# Altium PCB PCB.PcbDoc
Units mil, origin at the board's own origin, x right, y up, seen from the top; angles counter-clockwise.
Board outline 4000 x 6000 mil, 2 copper layers (Top Layer, Bottom Layer); 79 components, 68 nets, 288 pads, 16 vias.
Unrouted connection lines stored in the file: 188.
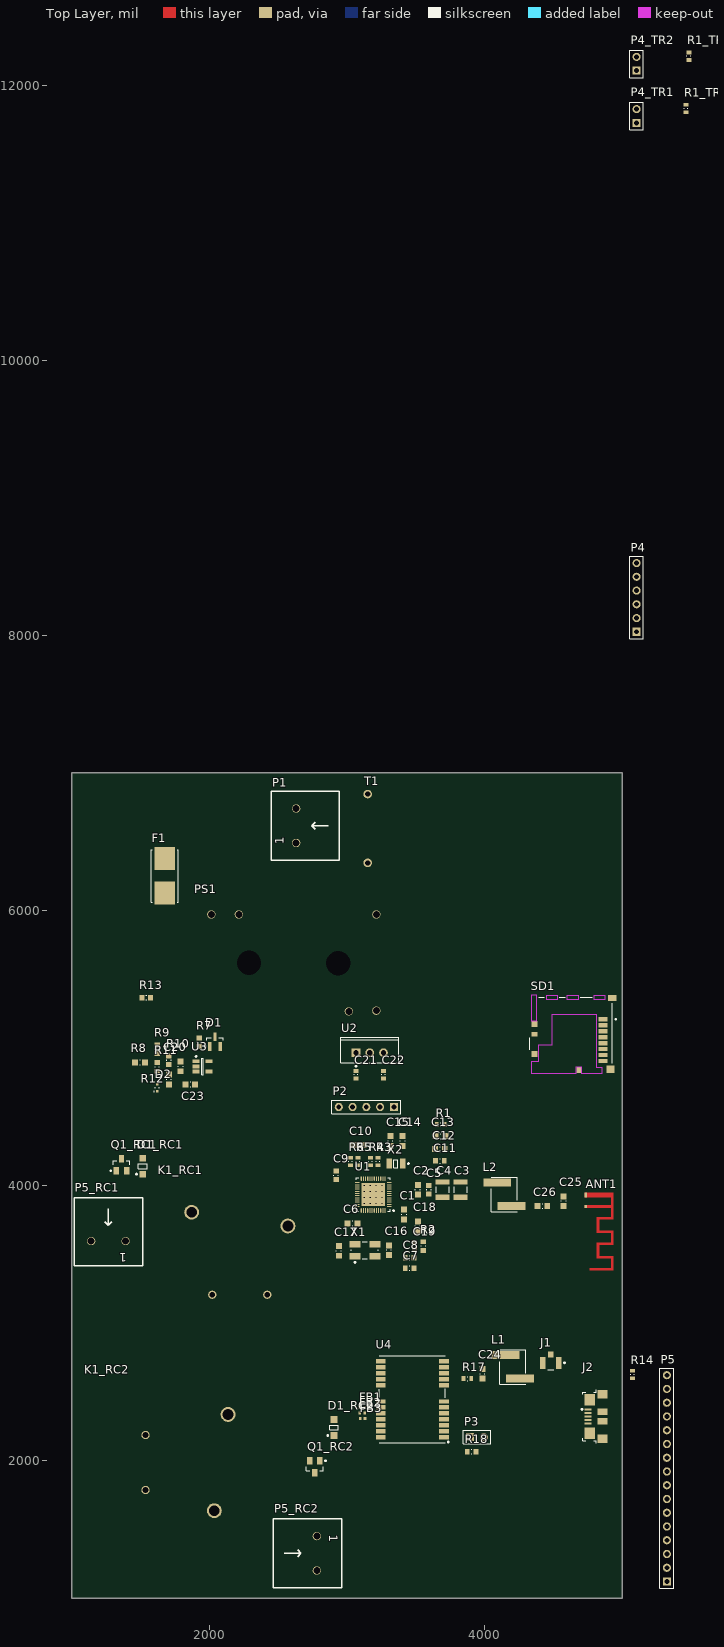
[diagram p0: Top Layer view]
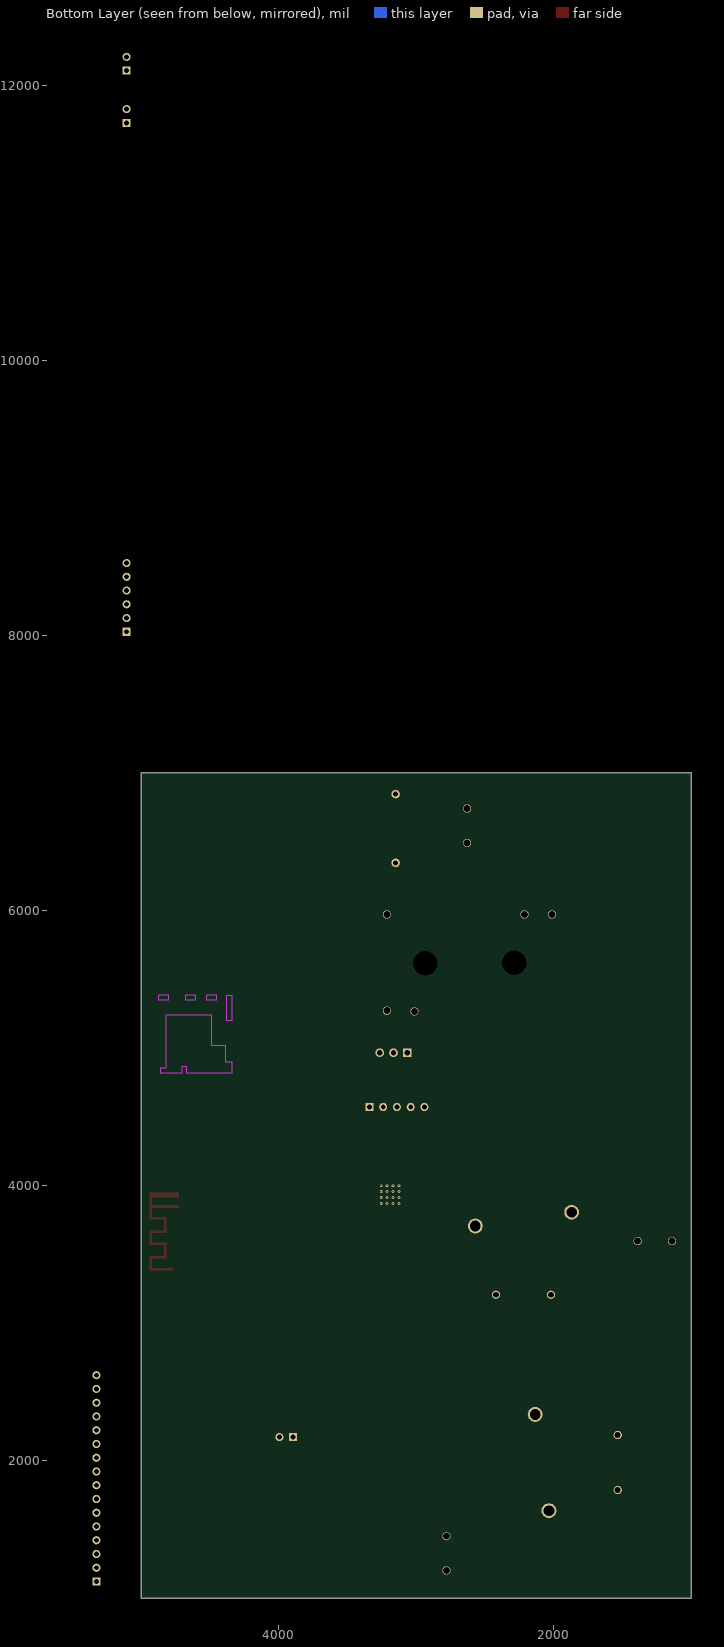
[diagram p1: Bottom Layer view, seen from below]

## Layer stack, top to bottom
Top Solder: solder mask 0.4, Solder Resist, Dk 3.5
Top Layer: signal copper 1.4
Dielectric 1: dielectric 12.6, FR-4, Dk 4.8
Bottom Layer: signal copper 1.4
Bottom Solder: solder mask 0.4, Solder Resist, Dk 3.5

## Board outline
1000,1000 1000,7000 5000,7000 5000,1000

## Design rules (kind name [scope] priority, off if disabled: settings)
Clearance [All] p1: gap=10
DiffPairsRouting [All] p1: maxlimit=10 minlimit=10 mostfreqgap=10 toplayer_minwidth=15 toplayer_maxwidth=15 toplayer_prefwidth=15 bottomlayer_minwidth=15 bottomlayer_maxwidth=15 bottomlayer_prefwidth=15 maxuncoupledlength=500
PolygonConnect [All] p1: connectstyle=Relief reliefconductorwidth=10 reliefentries=4 polygonreliefangle="90 Angle" airgapwidth=10
RoomDefinition UART [InComponentClass('UART')] p1: confinementstyle=ConfineIn formatcopy=TRUE lockcomponents=FALSE outline 5045,7965 5180,7965 5180,8685 5045,8685
RoomDefinition TR2 [InComponentClass('TR2')] p2: confinementstyle=ConfineIn formatcopy=TRUE lockcomponents=FALSE outline 5045,12045 5820,12045 5820,12375 5045,12375
RoomDefinition TR1 [InComponentClass('TR1')] p3: confinementstyle=ConfineIn formatcopy=TRUE lockcomponents=FALSE outline 5045,11665 5780,11665 5780,11995 5045,11995
RoomDefinition SD [InComponentClass('SD')] p4: confinementstyle=ConfineIn formatcopy=TRUE lockcomponents=FALSE outline 4314.13,4801.1 4314.13,5397.89 4973.9,5397.89 4973.9,4801.1
RoomDefinition RF [InComponentClass('RF')] p5: confinementstyle=ConfineIn formatcopy=TRUE lockcomponents=FALSE outline 3965,3370 4950,3370 4950,4085 3965,4085
RoomDefinition RC2 [InComponentClass('RC2')] p6: confinementstyle=ConfineIn formatcopy=TRUE lockcomponents=FALSE outline 1070,1060 2975,1060 2975,2600 1070,2600
RoomDefinition RC1 [InComponentClass('RC1')] p7: confinementstyle=ConfineIn formatcopy=TRUE lockcomponents=FALSE outline 1000,2740 2715,2740 2715,4240 1000,4240
RoomDefinition PWR [InComponentClass('PWR')] p8: confinementstyle=ConfineIn formatcopy=TRUE lockcomponents=FALSE outline 1405,4655 3395,4655 3395,6890 1405,6890
RoomDefinition MCU [InComponentClass('MCU')] p9: confinementstyle=ConfineIn formatcopy=TRUE lockcomponents=FALSE outline 2875,3353.5 3895,3353.5 3895,4478.5 2875,4478.5
RoomDefinition JTAG [InComponentClass('JTAG')] p10: confinementstyle=ConfineIn formatcopy=TRUE lockcomponents=FALSE outline 2876.06,4506.06 2876.06,4633.94 3403.94,4633.94 3403.94,4506.06
RoomDefinition GPS [InComponentClass('GPS')] p11: confinementstyle=ConfineIn formatcopy=TRUE lockcomponents=FALSE outline 3065,2020 4975,2020 4975,2830 3065,2830
RoomDefinition CEA2045 [InComponentClass('CEA2045')] p12: confinementstyle=ConfineIn formatcopy=TRUE lockcomponents=FALSE outline 5045,1060 5400,1060 5400,2780 5045,2780
RoutingVias [All] p1: holewidth=28 width=50 viastyle="Through Hole" minholewidth=28 minwidth=50 maxholewidth=28 maxwidth=50
SolderMaskExpansion [All] p1: expansion=4
Width [All] p1: maxlimit=10 minlimit=10 preferedwidth=10
29 further rules are at their usual default settings.

## Classes and differential pairs
component class CEA2045: P5 R14
component class GPS: C24 FB1 FB2 FB3 J1 J2 L1 P3 R17 R18 U4
component class JTAG: P2
component class MCU: C1 C2 C3 C4 C5 C6 C7 C8 C9 C10 C11 C12 C13 C14 C15 C16 C17 C18 C19 R1 R2 R3 R4 R5 R6 U1 X1 X2
component class PWR: C20 C21 C22 C23 D1 D2 F1 P1 PS1 R7 R8 R9 R10 R11 R12 R13 T1 U2 U3
component class RC1: D1_RC1 K1_RC1 P5_RC1 Q1_RC1
component class RC2: D1_RC2 K1_RC2 P5_RC2 Q1_RC2
component class RF: ANT1 C25 C26 L2
component class SD: SD1
component class TR1: P4_TR1 R1_TR1
component class TR2: P4_TR2 R1_TR2
component class UART: P4
net class AC: AC/L NetK1_RC1_COM NetK1_RC2_COM
net class RELAY[1..2]: RELAY1 RELAY2
net class SD_DATA[0..3]: SD_DATA0 SD_DATA1 SD_DATA2 SD_DATA3
net class THERM[1..2]: THERM1 THERM2
channel class Relay: RC1 RC2
channel class "Termistor Channel": TR1 TR2
differential pair USB: +USB_P -USB_N

## Components (designator, comment, footprint, x,y, rotation, side; value= is the part's Value field where it differs from the comment)
ANT1 "PCB_ANTENNA" 2.4GHZ_ANTENNA 4726.3,3947.48 r270 top
C1 "CAP 100nF 6.3V 0603(1608)" CAPC0603(1608)100_M 3415,3788.5 r90 top
C2 "CAP 100nF 6.3V 0603(1608)" CAPC0603(1608)100_M 3515,3968.5 r270 top
C3 "CAP 10uF 6.3V 1210(3225)" CAPC1210(3225)170_L 3825,3968.5 r270 top
C4 "CAP 10uF 6.3V 1210(3225)" CAPC1210(3225)170_L 3695,3968.5 r270 top
C5 "CAP 1uF 6.3V 0603(1608)" CAPC0603(1608)100_N 3595,3968.5 r90 top
C6 "CAP 100nF 6.3V 0603(1608)" CAPC0603(1608)100_M 3040,3723.5 r0 top
C7 "CAP 1uF 6.3V 0603(1608)" CAPC0603(1608)100_N 3455,3398.5 r0 top
C8 "CAP 100pF 10V 0603(1608)" CAPC0603(1608)100_N 3455,3473.5 r180 top
C9 "CAP 1uF 6.3V 0603(1608)" CAPC0603(1608)100_N 2920,4073.5 r90 top
C10 "CAP 100nF 6.3V 0603(1608)" CAPC0603(1608)100_M 3085,4293.5 r0 top
C11 "CAP 220pF 6.3V 0603(1608)" CAPC0603(1608)100_N 3675,4178.5 r0 top
C12 "CAP 100nF 6.3V 0603(1608)" CAPC0603(1608)100_M 3675,4263.5 r0 top
C13 "CAP 100nF 6.3V 0603(1608)" CAPC0603(1608)100_M 3680,4358.5 r180 top
C14 "CAP 12pF 16V 0603(1608)" CAPC0603(1608)100_M 3404.21,4323.5 r270 top
C15 "CAP 12pF 16V 0603(1608)" CAPC0603(1608)100_M 3315.79,4323.5 r270 top
C16 "CAP 22pF 16V 0603(1608)" CAPC0603(1608)100_M 3305,3528.94 r90 top
C17 "CAP 10pF 10V 0603(1608)" CAPC0603(1608)100_M 2940,3523.94 r270 top
C18 "CAP 10nF 6.3V 0603(1608)" CAPC0603(1608)100_M 3515,3703.5 r90 top
C19 "CAP 3.3nF 6.3V 0603(1608)" CAPC0603(1608)100_L 3490,3558.5 r270 top
C20 "CAP 100nF 6.3V 0603(1608)" CAPC0603(1608)100_M 1790,4865.43 r90 top
C21 "CAP 220nF 10V 0603(1608)" CAPC0603(1608)100_L 3065,4805 r90 top
C22 "CAP 220nF 10V 0603(1608)" CAPC0603(1608)100_L 3265,4805 r90 top
C23 "CAP 150nF 10V 0603(1608)" CAPC0603(1608)100_M 1860.43,4735 r0 top
C24 "CAP 10nF 10V 0603(1608)" CAPC0603(1608)100_M 3985,2630 r90 top
C25 "CAP 2.4pF 100V 0603(1608)" CAPC0603(1608)100_M 4575,3885 r270 top
C26 "CAP 3.9pF 100V 0603(1608)" CAPC0603(1608)100_M 4420,3850 r0 top
D1 "LM4040A30IDBZRG4" TI-DBZ3_N 2040,5045 r90 top
D1_RC1 "SMF18AT1G" ONSC-SOD-123FL-2-498_V 1515,4140 r90 top (schematic designator D1)
D1_RC2 "SMF18AT1G" ONSC-SOD-123FL-2-498_V 2905,2240 r90 top (schematic designator D1)
D2 "1SS400T1" ONSC-SOD-523-2-502-01_V 1620,4710 r90 top
F1 "154001" LFUS-0154001.DR_V 1675,6250 r270 top
FB1 "BLM15HD102SN1B" MURA-BLM15-CHIP-2_V 3110,2385 r0 top
FB2 "BLM15HD102SN1B" MURA-BLM15-CHIP-2_V 3110,2345 r0 top
FB3 "BLM15HD102SN1B" MURA-BLM15-CHIP-2_V 3112.72,2305 r0 top
J1 "U.FL-R-SMT(10)" HRS-U.FL-R-SMT_V 4480,2710 r180 top
J2 "ZX62R-B-5P" HIRO-ZX62R-B-5P_V 4805,2320 r90 top
K1_RC1 "T9A" "PCBComponent_1 - duplicate" 1970,3130 r0 top (schematic designator K1)
K1_RC2 "T9A" "PCBComponent_1 - duplicate" 1460,2235 r270 top (schematic designator K1)
L1 "744912127" WE-CAIR_4248 4205,2680 r90 top
L2 "744912127" WE-CAIR_4248 4143.43,3935.24 r90 top
P1 "AC In" PCBComponent_1 2945,6365 r90 top
P2 "JTAG" HDR1X5 3340,4570 r180 top
P3 "Safeboot" HDR1X2 3895,2170 r0 top
P4 "Sparkfun FTDI" HDR1X6 5105,8025 r90 top
P4_TR1 "Thermistor" HDR1X2 5105,11725 r90 top (schematic designator P4)
P4_TR2 "Thermistor" HDR1X2 5105,12105 r90 top (schematic designator P4)
P5 "Micro S ATA" HDR1X16 5325,1120 r90 top
P5_RC1 "Element" PCBComponent_1 1515,3910 r180 top (schematic designator P5)
P5_RC2 "Element" PCBComponent_1 2465,1575 r270 top (schematic designator P5)
PS1 "IRM-03-12" "PCBComponent_1 - duplicate1" 1883,5150 r0 top
Q1_RC1 "BSS138" FAIR-SOT23-3_V 1360,4150 r90 top (schematic designator Q1)
Q1_RC2 "BSS138" FAIR-SOT23-3_V 2765,1955 r270 top (schematic designator Q1)
R1 "1K 5% 0603(1608)" RESC0603(1608)_L 3680,4443.5 r0 top
R1_TR1 "1K 5% 0603(1608)" RESC0603(1608)_L 5465,11830 r90 top (schematic designator R1)
R1_TR2 "1K 5% 0603(1608)" RESC0603(1608)_L 5485,12210 r90 top (schematic designator R1)
R2 "2K 5% 0603(1608)" RESC0603(1608)_N 3555,3558.5 r270 top
R3 "100R 5% 0603(1608)" RESC0603(1608)_L 3225,4173.5 r270 top
R4 "100R 5% 0603(1608)" RESC0603(1608)_L 3170,4173.5 r270 top
R5 "100R 5% 0603(1608)" RESC0603(1608)_L 3080,4173.5 r270 top
R6 "100R 5% 0603(1608)" RESC0603(1608)_L 3025,4173.5 r270 top
R7 "30R 5% 0603(1608)" RESC0603(1608)_N 1925,5041.5 r90 top
R8 "2M2 1% 0603(1608)" RESC0603(1608)_M 1494.57,4895 r0 top
R9 "33K 5% 0603(1608)" RESC0603(1608)_N 1620,4990 r90 top
R10 "33K 5% 0603(1608)" RESC0603(1608)_N 1705,4910 r90 top
R11 "3K6 5% 0603(1608)" RESC0603(1608)_N 1620,4861.5 r270 top
R12 "7K5 5% 0603(1608)" RESC0603(1608)_M 1705,4770.43 r90 top
R13 "Jumper 0603(1608)" RESC0603(1608)_N 1540,5365 r180 top
R14 "1K 5% 0603(1608)" RESC0603(1608)_L 5075,2625 r90 top
R17 "10R 5% 0603(1608)" RESC0603(1608)_L 3875,2595 r0 top
R18 "1M 5% 0603(1608)" RESC0603(1608)_N 3905,2065 r180 top
SD1 "ST9S008V4AR1500" JAE-ST9S008V4AR1500_V 4645,5100 r270 top
T1 "PE-51686NL" PE-51686NL 3150,6345 r90 top
U1 "ESP32" QFN40P600X600X90_HS-49N 3190,3933.5 r180 top
U2 "LM340T-15" NDE0003A 3165,4965 r0 top
U3 "TLV2361IDBVRG4" TI-DBV5_M 1950,4865 r0 top
U4 "NEO-M8T" NEO 3475,2445 r0 top
X1 "7B-40.000MAAJ-T" TXC-7B-4_V 3130,3528.94 r0 top
X2 "14340272-32.768KHz" ITTI-14340272-32.768KHz-2_V 3355,4158.5 r180 top

## Footprints (in the part's own frame and the unit in brackets; to place one, negate y for a bottom-side part, rotate by r counter-clockwise, add the part's x,y. Pads: shape width x height; smd on the part's side, far side on the other; paste and mask are expansions set on the pad)
2.4GHZ_ANTENNA [mm]
  rect 0.9x0.5 smd paste-9 mask-9: 0(0.45,0.25)
  rect 0.5x0.5 smd paste-9 mask-9: 1(2.55,0.25)
  Top Layer region: 0,0 0.9,0 0.9,4.9 0,4.9
  Top Layer region: 0,4.9 5,4.9 5,5.4 0,5.4
  Top Layer region: 2.3,0 2.8,0 2.8,4.9 2.3,4.9
  Top Layer region: 4.5,2.26 5,2.26 5,4.9 4.5,4.9
  Top Layer region: 5,2.26 7,2.26 7,2.76 5,2.76
  Top Layer region: 7,2.26 7.5,2.26 7.5,4.9 7,4.9
  Top Layer region: 7,4.9 9.7,4.9 9.7,5.4 7,5.4
  Top Layer region: 9.2,2.26 9.7,2.26 9.7,4.9 9.2,4.9
  Top Layer region: 9.7,2.26 11.7,2.26 11.7,2.76 9.7,2.76
  Top Layer region: 11.7,2.26 12.2,2.26 12.2,4.9 11.7,4.9
  Top Layer region: 11.7,4.9 14.4,4.9 14.4,5.4 11.7,5.4
  Top Layer region: 13.9,0.96 14.4,0.96 14.4,4.9 13.9,4.9
CAPC0603(1608)100_L [mm] "Chip Capacitor, Body 1.6x0.8mm, Height 1.0mm, IPC High Density"
  rect 0.7x0.9 smd: 1(-0.7,0) 2(0.7,0)
  silkscreen extent -0.05,-0.35 0.05,0.35, body extent -0.87,-0.47 0.88,0.48, height 1
CAPC0603(1608)100_M [mm] "Chip Capacitor, Body 1.6x0.8mm, Height 1.0mm, IPC Low Density"
  rect 1.1x1.1 smd: 1(-0.9,0) 2(0.9,0)
  silkscreen extent -0.05,-0.45 0.05,0.45, body extent -0.87,-0.47 0.88,0.48, height 1
CAPC0603(1608)100_N [mm] "Chip Capacitor, Body 1.6x0.8mm, Height 1.0mm, IPC Medium Density"
  rect 0.9x1 smd: 1(-0.8,0) 2(0.8,0)
  silkscreen extent -0.05,-0.4 0.05,0.4, body extent -0.87,-0.48 0.88,0.47, height 1
CAPC1210(3225)170_L [mm] "Chip Capacitor, Body 3.2x2.5mm, Height 1.7mm, IPC High Density"
  rect 0.95x2.6 smd: 1(-1.4,0) 2(1.4,0)
  silkscreen extent -0.55,-1.2 0.55,1.2, body extent -1.7,-1.35 1.7,1.35, height 1.7
FAIR-SOT23-3_V [mm] "SOT23, 3-Leads, Body 3.12x1.5mm, Pitch 0.95mm"
  rect 1.4x1 smd: 1(-1.1,0.95) 2(-1.1,-0.95) 3(1.1,0)
  silkscreen extent -1.22,-1.55 0.75,2.12, body extent -1.35,-1.56 1.35,1.56, height 1.2
HDR1X2 [mm] "Connector; Header; 2 Position"
  rect 1.5x1.5 hole 0.9: 1(0,0)
  round 1.5 hole 0.9: 2(2.54,0)
  silkscreen extent -1.27,-1.27 3.81,1.27
HDR1X5 [mm] "Connector; Header; 5 Position"
  rect 1.5x1.5 hole 0.9: 1(0,0)
  round 1.5 hole 0.9: 2(2.54,0) 3(5.08,0) 4(7.62,0) 5(10.16,0)
  silkscreen extent -1.27,-1.27 11.43,1.27
HDR1X6 [mm] "Connector; Header; 6 Position"
  rect 1.5x1.5 hole 0.9: 1(0,0)
  round 1.5 hole 0.9: 2(2.54,0) 3(5.08,0) 4(7.62,0) 5(10.16,0) 6(12.7,0)
  silkscreen extent -1.27,-1.27 13.97,1.27
HDR1X16 [mm] "Connector; Header; 16 Position"
  rect 1.5x1.5 hole 0.9: 1(0,0)
  round 1.5 hole 0.9: 2(2.54,0) 3(5.08,0) 4(7.62,0) 5(10.16,0) 6(12.7,0) 7(15.24,0) 8(17.78,0) 9(20.32,0) 10(22.86,0) 11(25.4,0) 12(27.94,0) 13(30.48,0) 14(33.02,0) 15(35.56,0) 16(38.1,0)
  silkscreen extent -1.27,-1.27 39.37,1.27
HIRO-ZX62R-B-5P_V [mm] "USB Micro-B R/A Connector"
  rect 0.4x1.35 smd: 1(1.3,1.338) 2(0.65,1.338) 3(0,1.338) 4(-0.65,1.338) 5(-1.3,1.338)
  rect 2.1x2 smd: 6(-3.1,1.012) 11(3.1,1.012)
  rect 1.6x1.9 smd: 7(-4.1,-1.338) 10(4.1,-1.338)
  rect 1.2x1.9 smd: 8(-0.85,-1.338) 9(0.85,-1.338)
  silkscreen extent -4.95,-0.13 4.95,2.58, body extent -4.4,-3.95 4.4,1.78, height 2.71
HRS-U.FL-R-SMT_V [mm] "SMD, 3-Leads, Body 2.6x2.6mm"
  rect 1.05x2.2 smd: 1(-1.475,0) 2(1.475,0)
  rect 1x1.05 smd: 3(0,-1.525)
  silkscreen extent -2.68,-0.12 0.55,1.3, body extent -1.3,-1.3 1.3,1.3, height 1.25
ITTI-14340272-32.768KHz-2_V [mm] "Hand Drawn, 2-Leads, Body 3.2x1.5mm, Pitch 2.5mm"
  rect 1x1.8 smd: 1(-1.25,0) 2(1.25,0)
  silkscreen extent -2.43,-0.75 0.35,0.75, body extent -1.6,-0.75 1.6,0.75, height 0.9
JAE-ST9S008V4AR1500_V [mm] "SD Card, 8-Leads, Body 15.2x13.7mm, Pitch 1.1mm"
  rect 0.8x1.6 smd: 1(-2.737,5.475) 2(-1.637,5.475) 3(-0.537,5.475) 4(0.563,5.475) 5(1.663,5.475) 6(2.763,5.475) 7(3.863,5.475) 8(4.963,5.475)
  rect 1.45x1.4 smd: MP1(6.488,6.875)
  rect 1.15x0.9 smd: MP2(6.638,1.025)
  rect 1.1x1.1 smd: MP3(3.663,-7.175) MP5(-1.887,-7.175)
  rect 0.8x1.1 smd: MP4(0.013,-7.175)
  rect 1.1x1.6 smd: MP6(-6.637,7.175)
  Keep-Out Layer region: -6.337,-4.925 -7.187,-4.925 -7.187,-2.975 -6.337,-2.975
  Keep-Out Layer region: -2.437,-7.725 -2.437,-6.775 -7.187,-6.775 -7.187,-7.725
  Keep-Out Layer region: -6.337,-1.075 -7.187,-1.075 -7.187,0.875 -6.337,0.875
  Keep-Out Layer region: -6.337,3.875 -7.187,3.875 -7.187,5.825 -6.337,5.825
  Keep-Out Layer region: -3.587,4.375 -3.587,-3.975 2.063,-3.975 2.063,-6.475 5.113,-6.475 5.113,-7.725 7.213,-7.725 7.213,0.575 6.063,0.575 6.063,1.475 7.213,1.475 7.213,5.375 6.213,5.375 6.213,4.375
  silkscreen extent -6.84,-8.02 5.36,7.95, body extent -6.84,-8.02 7.16,7.18, height 1.55
LFUS-0154001.DR_V [mm] "SMD, 2-Leads, Body 9.73x5.03mm"
  rect 4.24x3.81 smd: 1(-3.185,0) 2(3.185,0)
  silkscreen extent -4.86,-2.51 4.86,2.51, body extent -4.86,-2.51 4.87,2.52, height 3.81
MURA-BLM15-CHIP-2_V [mm] "Chip Ferrite Bead, 2-Leads, Body 1x0.5mm"
  rect 0.5x0.5 smd: 1(-0.45,0) 2(0.45,0)
  body extent -0.52,-0.28 0.53,0.28, height 0.55
NDE0003A [mm] "FM, 3-Leads, Body 10.7x4.7mm, Pitch 2.54mm"
  rect 1.6x1.6 hole 1: 1(-2.54,0)
  round 1.6 hole 1: 2(0,0) 3(2.54,0)
  silkscreen extent -5.35,-2.62 5.35,2.85, body extent -5.4,-1.9 5.4,2.9, height 19.4
NEO [mm] "u-blox NEO GNSS module"
  rect 1.8x0.8 smd paste-0.1: 1(5.842,-7) 2(5.842,-5.9) 3(5.842,-4.8) 4(5.842,-3.7) 5(5.842,-2.6) 6(5.842,-1.5) 7(5.842,-0.4) 8(5.842,2.6) 9(5.842,3.7) 10(5.842,4.8) 11(5.842,5.9) 12(5.842,7) 13(-5.842,7) 14(-5.842,5.9) 15(-5.842,4.8) 16(-5.842,3.7) 17(-5.842,2.6) 18(-5.842,-0.4) 19(-5.842,-1.5) 20(-5.842,-2.6) 21(-5.842,-3.7) 22(-5.842,-4.8) 23(-5.842,-5.9) 24(-5.842,-7)
  silkscreen extent -6.11,-8 6.69,8, body extent -6.1,-8 6.1,8, height 2.28
ONSC-SOD-123FL-2-498_V [mm] "SOD, 2-Leads, Body 2.7x1.65mm"
  rect 1.25x1.22 smd: 1(-1.475,0) 2(1.475,0)
  silkscreen extent -1.6,-0.82 0.45,1.28, body extent -1.35,-0.82 1.35,0.82, height 0.98
ONSC-SOD-523-2-502-01_V [mm] "SOD, 2-Leads, Body 1.2x0.8mm"
  rect 0.48x0.4 smd: 1(-0.66,0) 2(0.66,0)
  silkscreen extent -0.75,-0.4 0.07,0.65, body extent -0.6,-0.4 0.6,0.4, height 0.7
PCBComponent_1 [mil]
  round 60 hole 51: 1(125,315) 2(375,315)
  silkscreen extent 0,0 500,495
"PCBComponent_1 - duplicate" [mil]
  round 60 hole 43: "COIL A"(50,75) "COIL B"(450,75)
  round 108 hole 78: COM(600,575) LOAD(-100,675)
"PCBComponent_1 - duplicate1" [mil]
  round 60 hole 51: +V(1130,115) -V(1330,120) AC/L(130,820) AC/N(330,820) NC3(1330,820)
  round 60 hole 177: NC1(404,470) NC2(1052,465)
PE-51686NL [mil]
  round 62 hole 38: 1(0,0) 2(500,0)
QFN40P600X600X90_HS-49N [mm] "QFN, 48-Leads, Body 6.00x6.00mm, Pitch 0.40mm, Thermal Pad 4.30x4.30mm, IPC Medium Density"
  oval 0.85x0.2 smd: 1(-2.95,2.2) 2(-2.95,1.8) 3(-2.95,1.4) 4(-2.95,1) 5(-2.95,0.6) 6(-2.95,0.2) 7(-2.95,-0.2) 8(-2.95,-0.6) 9(-2.95,-1) 10(-2.95,-1.4) 11(-2.95,-1.8) 12(-2.95,-2.2) 25(2.95,-2.2) 26(2.95,-1.8) 27(2.95,-1.4) 28(2.95,-1) 29(2.95,-0.6) 30(2.95,-0.2) 31(2.95,0.2) 32(2.95,0.6) 33(2.95,1) 34(2.95,1.4) 35(2.95,1.8) 36(2.95,2.2)
  oval 0.2x0.85 smd: 13(-2.2,-2.95) 14(-1.8,-2.95) 15(-1.4,-2.95) 16(-1,-2.95) 17(-0.6,-2.95) 18(-0.2,-2.95) 19(0.2,-2.95) 20(0.6,-2.95) 21(1,-2.95) 22(1.4,-2.95) 23(1.8,-2.95) 24(2.2,-2.95) 37(2.2,2.95) 38(1.8,2.95) 39(1.4,2.95) 40(1,2.95) 41(0.6,2.95) 42(0.2,2.95) 43(-0.2,2.95) 44(-0.6,2.95) 45(-1,2.95) 46(-1.4,2.95) 47(-1.8,2.95) 48(-2.2,2.95)
  rect 4.3x4.3 smd: 49(0,0)
  silkscreen extent -3.9,-3.13 3.13,3.13, body extent -2.99,-2.99 2.99,2.99, height 0.9
RESC0603(1608)_L [mm] "Chip Resistor, Body 1.6x0.8mm, IPC High Density"
  rect 0.7x0.9 smd: 1(-0.7,0) 2(0.7,0)
  silkscreen extent -0.05,-0.35 0.05,0.35, body extent -0.85,-0.47 0.85,0.47, height 0.6
RESC0603(1608)_M [mm] "Chip Resistor, Body 1.6x0.8mm, IPC Low Density"
  rect 1.1x1.1 smd: 1(-0.9,0) 2(0.9,0)
  silkscreen extent -0.05,-0.45 0.05,0.45, body extent -0.85,-0.47 0.85,0.47, height 0.6
RESC0603(1608)_N [mm] "Chip Resistor, Body 1.6x0.8mm, IPC Medium Density"
  rect 0.9x1 smd: 1(-0.8,0) 2(0.8,0)
  silkscreen extent -0.05,-0.4 0.05,0.4, body extent -0.85,-0.47 0.85,0.47, height 0.6
TI-DBV5_M [mm] "SOT23, 5-Leads, Body 2.9x1.6mm, Pitch 0.95mm, IPC Low Density"
  rect 1.3x0.7 smd: 1(-1.2,0.95) 2(-1.2,0) 3(-1.2,-0.95) 4(1.2,-0.95) 5(1.2,0.95)
  silkscreen extent -1.32,-1.55 0.15,1.97, body extent -0.87,-1.52 0.87,1.53, height 1.45
TI-DBZ3_N [mm] "SOT23, 3-Leads, Body 2.92x1.3 mm, Pitch 0.95 mm, IPC Medium Density"
  rect 1.6x0.6 smd: 1(-0.9,0.95) 2(-0.9,-0.95) 3(0.9,0)
  silkscreen extent -1.02,-1.5 0.7,1.92, body extent -0.7,-1.52 0.7,1.52, height 1.12
TXC-7B-4_V [mm] "SMD, 4-Leads, Body 5x3.2mm, Pitch 3.7mm"
  rect 2x1.2 smd: 1(-1.85,-1.1) 2(1.85,-1.1) 3(1.85,1.1) 4(-1.85,1.1)
  silkscreen extent -2.5,-2.37 2.5,1.6, body extent -2.5,-1.6 2.5,1.6, height 1.05
WE-CAIR_4248 [mm] "SMD Inductor, 2-Leads, Body 4.83 x 6.36mm"
  rect 1.48x5.16 smd: 1(-2.165,-1.31) 2(2.165,1.31)
  silkscreen extent -3.18,-2.41 3.18,2.42, body extent -2.38,-3.18 2.45,3.18, height 4.16

## Part data
C1 C2 C6 C10 C12 C13: library part CMP-1035-02575-1, "CAP 100nF 6.3V ±5% 0603 (1608 Metric) Thickness 1mm SMD"
C3 C4: library part CMP-1038-02188-1, "CAP 10uF 6.3V ±10% 1210 (3225 Metric) Thickness 1.7mm SMD"
C5 C7 C9: library part CMP-1035-02730-1, "CAP 1uF 6.3V ±10% 0603 (1608 Metric) Thickness 1mm SMD"
C8: library part CMP-1035-01255-1, "CAP 100pF 10V ±10% 0603 (1608 Metric) Thickness 1mm SMD"
C11: library part CMP-1035-01452-1, "CAP 220pF 6.3V ±10% 0603 (1608 Metric) Thickness 1mm SMD"
C14 C15: library part CMP-1035-00607-1, "CAP 12pF 16V ±10% 0603 (1608 Metric) Thickness 1mm SMD"
C16: library part CMP-1035-00809-1, "CAP 22pF 16V ±10% 0603 (1608 Metric) Thickness 1mm SMD"
C17: library part CMP-1035-00539-1, "CAP 10pF 10V ±10% 0603 (1608 Metric) Thickness 1mm SMD"
C18: library part CMP-1035-02302-1, "CAP 10nF 6.3V ±10% 0603 (1608 Metric) Thickness 1mm SMD"
C19: library part CMP-1035-02104-1, "CAP 3.3nF 6.3V ±10% 0603 (1608 Metric) Thickness 1mm SMD"
C20: library part CMP-1035-02576-1, "CAP 100nF 6.3V ±10% 0603 (1608 Metric) Thickness 1mm SMD"
C21 C22: library part CMP-1035-02640-1, "CAP 220nF 10V ±10% 0603 (1608 Metric) Thickness 1mm SMD"
C23: library part CMP-1035-02611-1, "CAP 150nF 10V ±10% 0603 (1608 Metric) Thickness 1mm SMD"
C24: library part CMP-1035-02306-1, "CAP 10nF 10V ±10% 0603 (1608 Metric) Thickness 1mm SMD"
C25: library part CMP-1035-00176-1, "CAP 2.4pF 100V ±0.25pF 0603 (1608 Metric) Thickness 1mm SMD"
C26: library part CMP-1035-00286-1, "CAP 3.9pF 100V ±0.1pF 0603 (1608 Metric) Thickness 1mm SMD"
D1: library part CMP-0366-01119-1, "Precision Micropower Shunt Voltage Reference, 0.1% accuracy, 3 V, 15 ppm / degC, 15 mA, -40 to 85 degC, 3-pin SOT-23 (DBZ), Green (RoHS & no Sb/Br)"
D1_RC1 D1_RC2: library part CMP-1061-00605-1, "200 W Transient Voltage Suppressor, 2-Pin SOD-123FL, Pb-Free, Tape and Reel"
D2: library part CMP-1054-00079-1, "High-Speed Switching Diode, 2-Pin SOD-523, Pb-Free, Tape and Reel"
F1: library part CMP-1700-00001-3, "154 Series OMNI-BLOK(R) Fuse and Holder Assembly, 125 VAC, 125 VDC, 1 A, -55 to 125 degC, 2-Pin SMD, RoHS"
FB1 FB2 FB3: library part CMP-0686-00278-3, "Chip Ferrite Bead for GHz Band High-speed Signal Lines, 1000 Ohm, 250 mA, -55 to 125 degC, 1 x 0.5 x 0.55 mm SMD, Bulk"
J1: library part CMP-0029-00003-1, "Ultra Small Surface Mount Coaxial Connector, 50 Ohm, -40 to 90 degC, 3-Pin SMD, RoHS, Tape and Reel"
J2: library part CMP-0031-00001-1, "Connector; USBMicro-B,Reverse type, SMT; 5 Position; Right Angle"
L1 L2: library part CMP-1497-00015-1, "WE-CAIR Air Coil, L=27 nH"
P1 P5_RC1 P5_RC2: library part "EUROSTYLE 6 35 MM FIXED 2 CIR"
P2: library part "Header 5", "Header, 5-Pin"
P3 P4_TR1 P4_TR2: library part "Header 2", "Header, 2-Pin"
P4: library part "Header 6", "Header, 6-Pin"
P5: library part "Header 16", "Header, 16-Pin"
Q1_RC1 Q1_RC2: library part CMP-1670-00009-1, "N-Channel Logic Level Enhancement Mode Field Effect Transistor, 220 mA, 50 V, -55 to 150 degC, 3-Pin SOT-23, RoHS, Tape and Reel"
R1 R1_TR1 R1_TR2 R14: library part CMP-1012-00074-1, "1K 0.1W 5% 0603 (1608 Metric)  SMD"
R2: library part CMP-1012-00081-1, "2K 0.1W 5% 0603 (1608 Metric)  SMD"
R3 R4 R5 R6: library part CMP-1012-00050-1, "100R 0.1W 5% 0603 (1608 Metric)  SMD"
R7: library part CMP-1012-00037-1, "30R 0.1W 5% 0603 (1608 Metric)  SMD"
R8: library part CMP-1012-00885-1, "2M2 0.1W 1% 0603 (1608 Metric)  SMD"
R9 R10: library part CMP-1012-00110-1, "33K 0.1W 5% 0603 (1608 Metric)  SMD"
R11: library part CMP-1012-00087-1, "3K6 0.1W 5% 0603 (1608 Metric)  SMD"
R12: library part CMP-1012-00095-1, "7K5 0.1W 5% 0603 (1608 Metric)  SMD"
R13: library part CMP-1012-00001-1, "Jumper 0603 (1608 Metric)"
R17: library part CMP-1012-00026-1, "10R 0.1W 5% 0603 (1608 Metric)  SMD"
R18: library part CMP-1012-00146-1, "1M 0.1W 5% 0603 (1608 Metric)  SMD"
SD1: library part CMP-1754-00001-1, "Micro SD Memory Card Connector, -25 to 85 degC, 8-Pin SMD, RoHS, Tape and Reel"
U2: library part CMP-0062-02463-3, "Series 3-Terminal Positive Regulators, 3-pin TO-220"
U3: library part CMP-0017-00683-1, "Single High-Performance, Low-Voltage Operational Amplifier, 2 to 5 V, -40 to 85 degC, 5-pin SOT23 (DBV5), Green (RoHS & no Sb/Br)"
U4: library part NEO, "u-blox NEO GNSS module"
X1: library part CMP-1774-00003-1, "9B Series Quartz Crystal, 40 MHz, +/-30 ppm, 18 pF, -40 to 85 degC, 4-Pin SMD, RoHS, Tape and Reel"
X2: library part CMP-0463-00001-2, "Crystal, 32.768 KHz, -40 to 85 degC, 3.2 x 1.5 x 0.9 mm SMD"

## Via types
v1: diameter 19.68, hole 7.87, Top Layer to Bottom Layer, 16 vias

## Nets (pads, with @x,y where several pads share a name; then routed paths per layer and width w, separated by ;. In a path a pad name is that pad's centre, name@x,y a point inside that pad or via, vN(x,y) a via of type N, cw(c..) or ccw(c..) an arc to the next point about the centre after c; other vN are vias at no path point)
3V0: D1.1 R7.1 R9.2 U3.5
3V3: C1.2 C2.2 C3.2 C4.2 C5.1 C7.1 C8.2 C9.1 C10.2 C22.2 D2.1 P5.8 P5.9 R1.2 R7.2 R14.2 R18.2 U1.1 U1.3 U1.4 U1.19 U1.26 U1.43 U1.46 U2.3 U4.23
5V0: J2.1 U4.7
12V: "K1_RC1.COIL B" "K1_RC2.COIL B" C21.2 D1_RC1.1 D1_RC2.1 PS1.+V U2.1
AC/L: F1.1 K1_RC1.LOAD K1_RC2.LOAD P1.1 R8.1
AC/N: P1.2 P5_RC1.2 P5_RC2.2 PS1.AC/N R13.2
GND: ANT1.0 C1.1 C2.1 C3.1 C4.1 C5.2 C6.1 C7.2 C8.1 C9.2 C10.1 C13.1 C14.1 C15.1 C16.1 C17.1 C18.2 C20.1 C21.1 C22.1 C24.2 C25.1 D1.2 J1.1 J1.2 J2.5 L2.2 P3.2 P4.1 P4_TR1.1 P4_TR2.1 P5.10 P5.11 PS1.-V Q1_RC1.2 Q1_RC2.2 R10.1 R13.1 SD1.6 T1.2 U1.49 U2.2 U3.2 U4.2 U4.10 U4.12 U4.13 U4.24 X1.2 X1.4
  other v1: 3125.04,3868.54 3168.35,3868.54 3211.65,3868.54 3254.96,3868.54 3125.04,3911.85 3168.35,3911.85 3211.65,3911.85 3254.96,3911.85 3125.04,3955.16 3168.35,3955.16 3211.65,3955.16 3254.96,3955.16 3125.04,3998.46 3168.35,3998.46 3211.65,3998.46 3254.96,3998.46
NetANT1_1: ANT1.1 C25.2 C26.2
NetC11_1: C11.1 U1.6
NetC11_2: C11.2 U1.5
NetC12_1: C12.1 U1.8
NetC12_2: C12.2 U1.7
NetC13_2: C13.2 R1.1 U1.9
NetC14_2: C14.2 U1.12 X2.1
NetC15_2: C15.2 U1.13 X2.2
NetC16_2: C16.2 U1.44 X1.3
NetC17_2: C17.2 U1.45 X1.1
NetC18_1: C18.1 C19.1 R2.1 U1.48
NetC19_2: C19.2 R2.2 U1.47
NetC20_2: C20.2 R12.2 U3.1
NetC23_1: C23.1 D2.2 R11.2 R12.1
NetC23_2: C23.2 U1.10 U3.3 U3.4
NetC24_1: C24.1 L1.1 R17.2
NetC26_1: C26.1 L2.1 U1.2
NetD1_RC1_2: "K1_RC1.COIL A" D1_RC1.2 Q1_RC1.3
NetD1_RC2_2: "K1_RC2.COIL A" D1_RC2.2 Q1_RC2.3
NetF1_2: F1.2 PS1.AC/L
NetFB1_1: FB1.1 P5.3 U1.31
NetFB1_2: FB1.2 U4.19
NetFB2_1: FB2.1 P5.6 U1.32
NetFB2_2: FB2.2 U4.20
NetFB3_1: FB3.1 P5.5 U1.33
NetFB3_2: FB3.2 U4.21
NetJ1_3: J1.3 L1.2 U4.11
NetK1_RC1_COM: K1_RC1.COM P5_RC1.1
NetK1_RC2_COM: K1_RC2.COM P5_RC2.1
NetP2_2: P2.2 R3.1
NetP2_3: P2.3 R6.1
NetP2_4: P2.4 R4.1
NetP2_5: P2.5 R5.1
NetP3_1: P3.1 R18.1 U4.1
NetP4_2: P4.2 U1.38
NetP4_4: P4.4 U1.40
NetP4_5: P4.5 U1.41
NetP4_6: P4.6 U1.39
NetP5_2: P5.2 U1.27
NetP5_4: P5.4 U1.30
NetP5_7: P5.7 U1.29
NetP5_14: P5.14 R14.1 U1.28
NetR8_2: R8.2 R9.1 R10.2 R11.1
NetR17_1: R17.1 U4.9
NetT1_1: T1.1 U1.11
NetU1_34: U1.34 U4.18
NetU1_35: U1.35 U4.3
NetU1_36: U1.36 U4.8
RELAY1: Q1_RC1.1 U1.23
RELAY2: Q1_RC2.1 U1.14
SD_CLK: R3.2 SD1.5 U1.17
SD_CMD: R6.2 SD1.3 U1.21
SD_DATA0: SD1.7 U1.22
SD_DATA1: SD1.8 U1.24
SD_DATA2: R4.2 SD1.1 U1.18
SD_DATA3: R5.2 SD1.2 U1.20
THERM1: P4_TR1.2 R1_TR1.1 U1.15
THERM2: P4_TR2.2 R1_TR2.1 U1.16
USB_N: J2.3 U4.5
USB_P: J2.2 U4.6
VCC: C6.2 R1_TR1.2 R1_TR2.2 SD1.4 U1.37
pads on no net: D1.3 J2.4 J2.6 J2.7 J2.8 J2.9 J2.10 J2.11 P2.1 P4.3 P5.1 P5.12 P5.13 P5.15 P5.16 PS1.NC1 PS1.NC2 PS1.NC3 SD1.MP1 SD1.MP2 SD1.MP3 SD1.MP4 SD1.MP5 SD1.MP6 U1.25 U1.42 U4.4 U4.14 U4.15 U4.16 U4.17 U4.22

## Silkscreen, mask and mechanical layers (free items; w line width, h text height)
Mechanical 1:
  the board outline again, w10

## Text inside footprints (layer, text, board x,y; h text height)
J2: Mechanical 1 "Board edge" at 4910,2540 h7.87 r90
P1: Top Overlay "1" at 2540,6480 h60 r90
P5_RC1: Top Overlay "1" at 1400,3505 h60 r180
P5_RC2: Top Overlay "1" at 2870,1460 h60 r270